# Altium PCB VOLTAGE REGULATOR AC TO 12V DC PCB CIRCUIT.PcbDoc
Units mm, origin at the board's own origin, x right, y up, seen from the top; angles counter-clockwise.
Board outline 102.74 x 36.83 mm, 2 copper layers (Top Layer, Bottom Layer); 12 components, 7 nets, 28 pads, 0 vias.
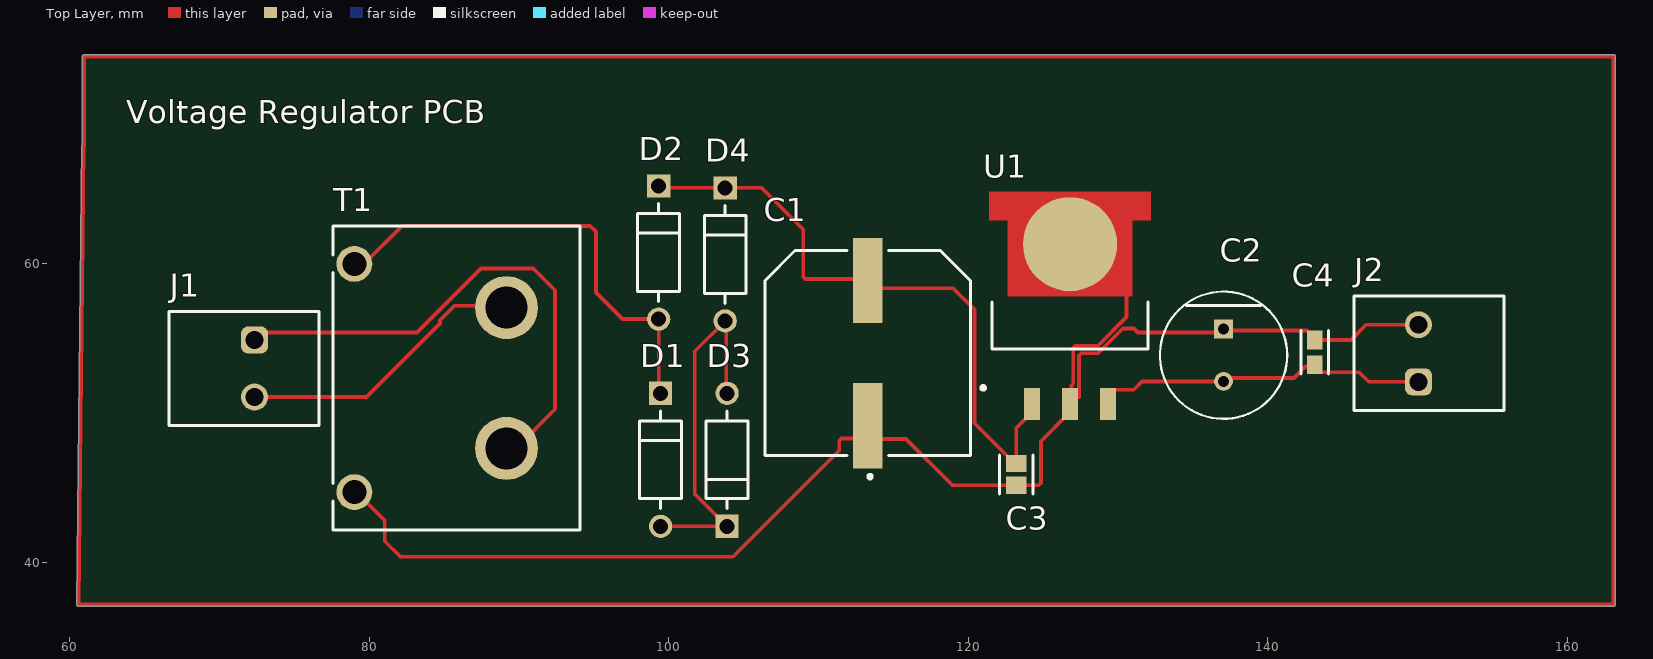
[diagram p0: Top Layer view]
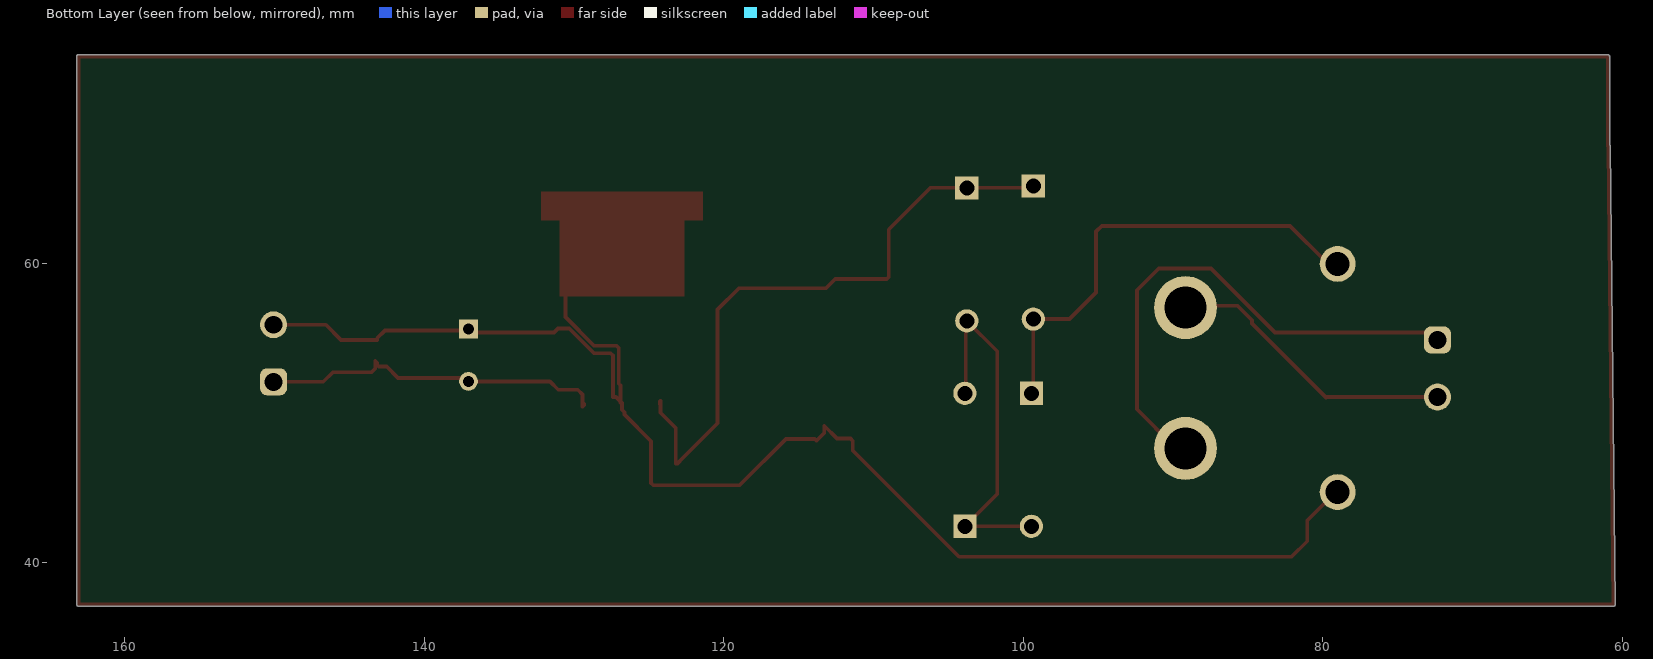
[diagram p1: Bottom Layer view, seen from below]
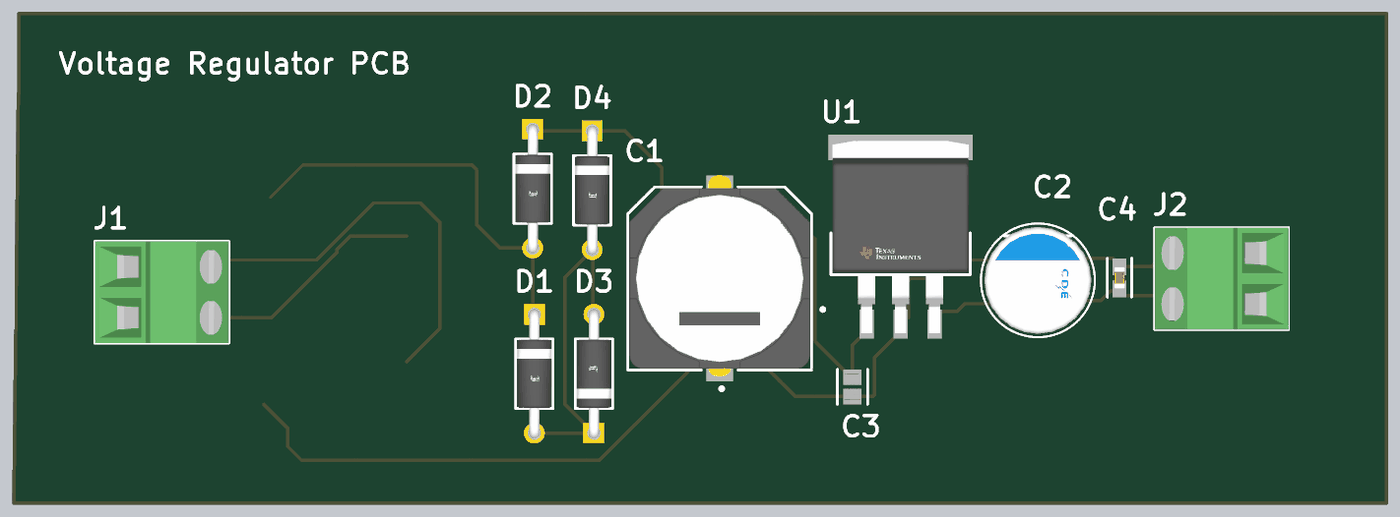
[diagram p2: 3D render of the assembled board from above, using the file's embedded part models]

## Layer stack, top to bottom
Top Solder: solder mask 0.0102, Solder Resist, Dk 3.5
Top Layer: signal copper 0.0356
Dielectric 1: dielectric 0.32, FR-4, Dk 4.8
Bottom Layer: signal copper 0.0356
Bottom Solder: solder mask 0.0102, Solder Resist, Dk 3.5

## Board outline
60.452,37.212 ccw(c60.579,37.211) 60.579,37.084 163.068,37.084 ccw(c163.068,37.211) 163.195,37.211 163.195,73.787 ccw(c163.068,73.787) 163.068,73.914 60.96,73.914 ccw(c60.96,73.787) 60.833,73.787 60.833,67.917 60.786,67.82

## Design rules (kind name [scope] priority, off if disabled: settings)
Clearance [All] p1: gap=0.254 ignorepadtopadclearanceinfootprint=FALSE
PolygonConnect [All] p1: connectstyle=Relief reliefconductorwidth=0.254 reliefentries=4 polygonreliefangle="90 Angle" airgapwidth=0.254
RoutingVias [All] p1: holewidth=0.711 width=1.27 viastyle="Through Hole" minholewidth=0.711 minwidth=1.27 maxholewidth=0.711 maxwidth=1.27
SolderMaskExpansion [All] p1: expansion=0.102 istentingtop=FALSE
Width [All] p1: maxlimit=0.254 minlimit=0.254 preferedwidth=0.254
30 further rules are at their usual default settings.

## Components (designator, comment, footprint, x,y, rotation, side; value= is the part's Value field where it differs from the comment)
C1 "470UF 35V" FP-FKH13-MFG 113.276,53.988 r90 top
C2 "470uF V25" FP-477AVG025MFBJ-MFG 137.033,53.848 r270 top
C3 "0.33uF" FP-GCJ21B-0_3-IPC_C 123.19,45.884 r270 top
C4 "0.1uF" FP-GCG188-0_2-IPC_A 143.129,54.039 r90 top
D1 "1N4007" FP-1N4007-MFG 99.441,46.863 r270 top value=15pF
D2 "1N4007" FP-1N4007-MFG 99.314,60.701 r270 top value=15pF
D3 "1N4007" FP-1N4007-MFG 103.886,46.863 r90 top value=15pF
D4 "1N4007" FP-1N4007-MFG 103.759,60.579 r270 top value=15pF
J1 "691221320002" 691221320002 71.628,52.959 r270 top
J2 "691221320002" 691221320002 150.749,53.975 r90 top
T1 "7492551500" WE-CSTLF_EI187 1355.809,1322.325 r0 top
U1 "LM7812SX/NOPB" FP-KTT0003B-MFG 126.785,57.133 r0 top

## Footprints (in the part's own frame and the unit in brackets; to place one, negate y for a bottom-side part, rotate by r counter-clockwise, add the part's x,y. Pads: shape width x height; smd on the part's side, far side on the other; paste and mask are expansions set on the pad)
691221320002 [mm] "3,81mm - modular - green - 55¡ã wire entry - Cage clamp - 02p"
  rrect50% 1.8x1.8 hole 1.2: 1(-1.905,0.7)
  round 1.8 hole 1.2: 2(1.905,0.7)
  silkscreen extent -3.81,-5 3.81,5, body extent -3.81,-5 3.81,5, height 9.55
FP-1N4007-MFG [mm]
  rect 1.55x1.55 hole 1 paste-2539.97 mask+0: 1(-4.44,0)
  round 1.55 hole 1 paste-2539.97 mask+0: 2(4.44,0)
  silkscreen extent -3.26,-1.4 3.26,1.4, body extent -5.32,-1.5 5.32,1.5, height 0.25
FP-477AVG025MFBJ-MFG [mm]
  rect 1.25x1.25 hole 0.75 paste-2539.97 mask+0: 1(-1.75,0)
  round 1.25 hole 0.75 paste-2539.97 mask+0: 2(1.75,0)
  silkscreen extent -4.25,-4.25 4.25,4.25, body extent -4.35,-4.35 4.35,4.35, height 0.25
FP-FKH13-MFG [mm]
  rect 5.7x2 smd paste+0 mask+0: 1(-4.85,0) 2(4.85,0)
  silkscreen extent -8.37,-6.85 6.85,6.85, body extent -7.95,-7.1 7.95,7.1, height 0.25
FP-GCG188-0_2-IPC_A [mil]
  rect 49.42x39.85 smd paste+0 mask+0: 1(-32.5,0) 2(32.5,0)
  silkscreen extent -57,-36 57,36, body extent -77,-40 77,40, height 10
FP-GCJ21B-0_3-IPC_C [mm]
  rect 1.153x1.356 smd paste+0 mask+0: 1(-0.725,0) 2(0.725,0)
  silkscreen extent -1.3,-1.12 1.3,1.12, body extent -1.4,-0.82 1.4,0.82, height 0.25
FP-KTT0003B-MFG [mm]
  rect 1.07x2.16 smd paste+0 mask+0: 1(-2.54,-6.545) 2(0,-6.545) 3(2.54,-6.545)
  round 6.291 smd paste+0 mask+0: 4(0,4.13)
  Top Layer region: 5.4,7.625 -5.4,7.625 -5.4,5.715 -4.165,5.715 -4.165,0.635 4.165,0.635 4.165,5.715 5.4,5.715 5.4,7.625
  silkscreen extent -5.93,-5.59 5.21,0.26, body extent -5.5,-7.73 5.5,7.73, height 0.25
WE-CSTLF_EI187 [mm] "Current Sense Transformer, body 16.50 x 20.30 mm"
  round 4.2 hole 2.8: 1(-1266.655,-1274.7) 2(-1266.655,-1265.3)
  round 2.4 hole 1.6: 3(-1276.815,-1262.38) 4(-1276.815,-1277.62)
  silkscreen extent -1278.25,-1280.15 -1261.75,-1259.85, body extent -1277.82,-1279.65 -1262.19,-1260.35, height 16.81

## Part data
C1: library part CMP-05427-000043-1, "CAP ALUM 470UF 20% 35V SMD", Capacitance=470uF, Case/Package=Radial, ESR (Equivalent Series Resistance)=60mR, Leakage Current=3uA, Max Operating Temperature=105°C, Min Operating Temperature=-55°C, Package Quantity=200, Ripple Current=1.1A, Tolerance=20%, Voltage=35V, Construction=Cylindrical, Contact Plating=Tin, Diameter=12.5mm, Dissipation Factor=0.12%, Height=13.5mm, Height - Seated (Max)=0.531inch, Impedance=60mR, Lead Free="Lead Free", Length=13.5mm, Life (Hours)=5000Hour, Material=Aluminium, Mount="Surface Mount", Packaging="Tape and Reel", Radiation Hardening=No, REACH SVHC="No SVHC", Ripple Current (AC)=1.1A, RoHS Compliant=Yes, Series=FK, Termination=SMD/SMT, Voltage Rating=35V, Voltage Rating (DC)=35V, Width=900um
C2: library part CMP-00087-58146277-1, "477AVG025MFBJ Cap Aluminum Polymer 470uF 25VDC 20% (8 X 12mm) Radial 3.5mm 0.018 Ohm 4250mA 2000h 125C", Capacitance=470µF, Case/Package=Radial, ESR (Equivalent Series Resistance)=18mΩ, Leakage Current=2.35mA, Max Operating Temperature=125°C, Min Operating Temperature=-55°C, Ripple Current=4.25A, Tolerance=20%, Voltage Rating=25V, Dissipation Factor=12%, Height=13.5mm, Life (Hours)=1500hours, NexarPartId=58146277, RoHS=Non-Compliant, Voltage Rating (DC)=25V
C3: library part CMP-06035-049969-1, "Multilayer Ceramic Capacitors MLCC - SMD/SMT 0805 0.33uF 10%, 50VDC,  X7R 15%", Lead Free="Lead Free"
C4: library part CMP-06035-032904-1, "AgPd Termination Conductive Glue Mounting Chip Multilayer Ceramic Capacitors for Automotive 0.1uF with 20% as tolerance, 50V X8R 15%, 0603 Package"
D1 D2 D3 D4: library part CMP-123542-000001-1, "Rectifier diode 1000 V 1 A DO-41, ,", Capacitance=15pF, Forward Current=1A, Manufacturer=Diotec, Max Junction Temp=+175°C, Max Repetitive Reverse Voltage=1000V, Max Surge Forward Current=27A, Peak Reverse Current=5uA, Temperature="-50°C to +175°C", Temperature Range Low=-50°C, Automotive=No, Category=Diode, ComponentLink2Description=Datasheet, ComponentLink2URL=https://datasheet.octopart.com/1N4007-Diotec-datasheet-62346875.pdf, Device Class L1="Discrete Semiconductors", Device Class L2=Diodes, Device Class L3="Rectifier Diodes", Height=2.8mm, Ipc Land Pattern Name=DIOAD888W100L520D280, Lead Free=Yes, Manufacturer Part Number=1N4007, Octopart=https://octopart.com/1n4007-diotec-4040411, Package=1N4007, Reverse Voltage=1000V, RoHS=TRUE, Temperature Range High=+175°C
J1 J2: library part CMP-1502-02500-3, "Terminal Block, 3.81MM Pitch, 55DEG, Rising Cage Clamp, 28-16AWG, 2 Pin"
T1: library part CMP-03913-148624224-1, "Current Sense Transformer, 3.6H, Th Rohs Compliant: Yes"
U1: library part CMP-04917-000346-1, "IC REG LIN 12V 1.5A DDPAK/TO263", Case/Package=TO-263, Dropout Voltage=2V, Max Operating Temperature=125°C, Min Operating Temperature=0°C, Quiescent Current=8mA, Lead Free="Contains Lead", RoHS Compliant=Yes

## Nets (pads, with @x,y where several pads share a name; then routed paths per layer and width w, separated by ;. In a path a pad name is that pad's centre, name@x,y a point inside that pad or via, vN(x,y) a via of type N, cw(c..) or ccw(c..) an arc to the next point about the centre after c; other vN are vias at no path point)
NetC1_1: C1.1 C2.1 C3.2 C4.2 J2.2 T1.4 U1.2 U1.4 | length 105.9
  Top Layer w0.254: T1.4@79.248,44.577 81.026,42.799 81.026,41.424 82.064,40.386 104.267,40.386 111.379,47.498 111.379,48.133 111.528,48.282 112.419,48.282 C1.1 113.276,48.649 113.792,48.133 113.919,48.26 115.824,48.26 118.926,45.158 C3.2 124.692,45.158 124.841,45.307 124.841,48.099 126.619,49.877 126.619,50.038 126.785,50.204 U1.2 126.873,50.676 126.873,51.816 127,51.943 127,54.334 127.149,54.483 128.651,54.483 130.556,56.388 130.556,58.039 130.175,58.42 126.238,58.42 126.238,60.716 U1.4 ; U1.2@126.785,50.646 127.193,51.054 127.381,51.054 127.381,53.826 127.53,53.975 128.651,53.975 130.302,55.626 131.064,55.626 131.318,55.372 136.779,55.372 136.906,55.245 137.033,55.372 C2.1 137.188,55.598 137.287,55.499 142.616,55.499 143.129,54.986 C4.2 145.542,54.864 146.558,55.88 149.733,55.88 J2.2
NetC1_2: C1.2 C3.1 D2.1 D4.1 U1.1 | length 43.1
  Top Layer w0.254: D2.1 99.324,65.141 99.441,65.024 103.754,65.024 D4.1 D4.1@103.759,64.897 ; D4.1@103.632,64.77 103.82,64.958 103.886,65.024 106.172,65.024 108.966,62.23 108.966,59.077 109.115,58.928 112.546,58.928 113.157,58.317 118.975,58.317 120.396,56.896 120.396,49.302 122.936,46.762 122.936,46.736 123.063,46.609 C3.1 123.19,48.988 124.206,50.004 124.206,50.588 124.206,50.8 124.245,50.761 U1.1
NetC2_2: C2.2 C4.1 J2.1 U1.3 | length 23.6
  Top Layer w0.254: U1.3 129.325,50.507 129.413,50.419 129.413,51.221 129.733,51.541 131.043,51.541 131.6,52.098 C2.2 137.033,52.197 137.16,52.324 137.195,52.289 137.493,52.289 137.529,52.324 141.732,52.324 142.494,53.086 143.002,53.086 C4.1 143.129,53.34 143.256,53.467 143.256,52.964 143.508,52.712 146.083,52.712 146.726,52.07 J2.1
NetD1_1: D1.1 D2.2 T1.3 | length 30.8
  Top Layer w0.254: T1.3@79.756,60.072 82.168,62.484 94.742,62.484 95.123,62.103 95.123,58.039 96.901,56.261 98.715,56.261 98.933,56.043 98.933,56.007 99.187,56.261 D2.2 99.314,51.43 D1.1
NetD1_2: D1.2 D3.1 D3.2 D4.2 | length 25
  Top Layer w0.254: D1.2 D3.1 101.727,44.582 101.727,54.107 D4.2 103.881,56.139 104.013,56.007 103.822,55.816 103.822,51.366 D3.2
NetJ1_1: J1.1 T1.1 | length 34.1
  Top Layer w0.254: J1.1 72.517,55.053 72.517,55.118 72.771,55.372 83.185,55.372 87.446,59.633 90.944,59.633 92.397,58.18 92.397,50.233 T1.1@89.916,47.752
NetJ1_2: J1.2 T1.2 | length 20.3
  Top Layer w0.254: J1.2 73.025,51.054 79.756,51.054 79.778,51.032 84.709,55.963 84.709,56.178 85.683,57.152 T1.2@89.916,57.152
copper on no net: | length 277.8
  Top Layer w0.254: 60.913,67.819 60.579,37.211 163.068,37.211 163.068,73.787 60.96,73.787 60.96,67.818

## Silkscreen, mask and mechanical layers (free items; w line width, h text height)
Top Overlay:
  text "Voltage Regulator PCB" at 63.754,69.342 h1.52